# EAGLE board p8x-control-card (EAGLE 9.6.2)

Size 160 x 100 mm. Coordinates in mm from the lower left corner, seen from the top.
Outline: 0,0 160,0 160,100 0,100 0,0
Copper layers (1*2*15*16): Top / Route2 / Route15 / Bottom

## Footprints (pad centres in the part's own frame; a part is rotated, then mirrored left to right if it is on the bottom)
C_DISC = drill 0.9 pad 1.8: 1 0,0; 2 0,-5.08
C_DISC1 = drill 0.9 pad 1.8: 1 0,0; 2 0,-2.54
MABC96R = drill 0.914 pad 1.524: A1 -2.54,39.37; A2 -2.54,36.83; A3 -2.54,34.29; A4 -2.54,31.75; A5 -2.54,29.21; A6 -2.54,26.67; A7 -2.54,24.13; A8 -2.54,21.59; A9 -2.54,19.05; A10 -2.54,16.51; A11 -2.54,13.97; A12 -2.54,11.43; A13 -2.54,8.89; A14 -2.54,6.35; A15 -2.54,3.81; A16 -2.54,1.27; A17 -2.54,-1.27; A18 -2.54,-3.81; A19 -2.54,-6.35; A20 -2.54,-8.89; A21 -2.54,-11.43; A22 -2.54,-13.97; A23 -2.54,-16.51; A24 -2.54,-19.05; A25 -2.54,-21.59; A26 -2.54,-24.13; A27 -2.54,-26.67; A28 -2.54,-29.21; A29 -2.54,-31.75; A30 -2.54,-34.29; A31 -2.54,-36.83; A32 -2.54,-39.37; B1 0,39.37; B2 0,36.83; B3 0,34.29; B4 0,31.75; B5 0,29.21; B6 0,26.67; B7 0,24.13; B8 0,21.59; B9 0,19.05; B10 0,16.51; B11 0,13.97; B12 0,11.43; B13 0,8.89; B14 0,6.35; B15 0,3.81; B16 0,1.27; B17 0,-1.27; B18 0,-3.81; B19 0,-6.35; B20 0,-8.89; B21 0,-11.43; B22 0,-13.97; B23 0,-16.51; B24 0,-19.05; B25 0,-21.59; B26 0,-24.13; B27 0,-26.67; B28 0,-29.21; B29 0,-31.75; B30 0,-34.29; B31 0,-36.83; B32 0,-39.37; C1 2.54,39.37; C2 2.54,36.83; C3 2.54,34.29; C4 2.54,31.75; C5 2.54,29.21; C6 2.54,26.67; C7 2.54,24.13; C8 2.54,21.59; C9 2.54,19.05; C10 2.54,16.51; C11 2.54,13.97; C12 2.54,11.43; C13 2.54,8.89; C14 2.54,6.35; C15 2.54,3.81; C16 2.54,1.27; C17 2.54,-1.27; C18 2.54,-3.81; C19 2.54,-6.35; C20 2.54,-8.89; C21 2.54,-11.43; C22 2.54,-13.97; C23 2.54,-16.51; C24 2.54,-19.05; C25 2.54,-21.59; C26 2.54,-24.13; C27 2.54,-26.67; C28 2.54,-29.21; C29 2.54,-31.75; C30 2.54,-34.29; C31 2.54,-36.83; C32 2.54,-39.37 | hole 2.794: -0.3,45; -0.3,-45
HDR4 = drill 0.9 pad 1.8: 1 0,0; 2 0,-2.54; 3 0,-5.08; 4 0,-7.62
LED5 = drill 0.9 pad 1.8: 1 2.54,0; 2 0,0
R_AXIAL = drill 0.8 pad 1.6: 1 0,0; 2 10.16,0
SW2P = drill 1 pad 1.9: 1 0,0; 2 5.08,0
DIP16 = drill 0.813 pad 1.6: 1 0,0; 2 0,-2.54; 3 0,-5.08; 4 0,-7.62; 5 0,-10.16; 6 0,-12.7; 7 0,-15.24; 8 0,-17.78; 9 7.62,-17.78; 10 7.62,-15.24; 11 7.62,-12.7; 12 7.62,-10.16; 13 7.62,-7.62; 14 7.62,-5.08; 15 7.62,-2.54; 16 7.62,0
DIP14 = drill 0.813 pad 1.6: 1 0,0; 2 0,-2.54; 3 0,-5.08; 4 0,-7.62; 5 0,-10.16; 6 0,-12.7; 7 0,-15.24; 8 7.62,-15.24; 9 7.62,-12.7; 10 7.62,-10.16; 11 7.62,-7.62; 12 7.62,-5.08; 13 7.62,-2.54; 14 7.62,0
DIP20 = drill 0.813 pad 1.6: 1 0,0; 2 0,-2.54; 3 0,-5.08; 4 0,-7.62; 5 0,-10.16; 6 0,-12.7; 7 0,-15.24; 8 0,-17.78; 9 0,-20.32; 10 0,-22.86; 11 7.62,-22.86; 12 7.62,-20.32; 13 7.62,-17.78; 14 7.62,-15.24; 15 7.62,-12.7; 16 7.62,-10.16; 17 7.62,-7.62; 18 7.62,-5.08; 19 7.62,-2.54; 20 7.62,0
DIP28W = drill 0.813 pad 1.6: 1 0,0; 2 0,-2.54; 3 0,-5.08; 4 0,-7.62; 5 0,-10.16; 6 0,-12.7; 7 0,-15.24; 8 0,-17.78; 9 0,-20.32; 10 0,-22.86; 11 0,-25.4; 12 0,-27.94; 13 0,-30.48; 14 0,-33.02; 15 15.24,-33.02; 16 15.24,-30.48; 17 15.24,-27.94; 18 15.24,-25.4; 19 15.24,-22.86; 20 15.24,-20.32; 21 15.24,-17.78; 22 15.24,-15.24; 23 15.24,-12.7; 24 15.24,-10.16; 25 15.24,-7.62; 26 15.24,-5.08; 27 15.24,-2.54; 28 15.24,0
OSC4 = drill 0.8 pad 1.6: 1 0,0; 7 0,-15.24; 8 7.62,-15.24; 14 7.62,0

## Placement (x,y rotation side)
C1  1uF  [C_DISC]  256.03,3.76 0 top  (outside the outline)
C2  100nF  [C_DISC1]  215.19,95.1 0 top  (outside the outline)
C3  100nF  [C_DISC1]  231.41,95.1 0 top  (outside the outline)
C4  100nF  [C_DISC1]  247.63,95.1 0 top  (outside the outline)
C5  100nF  [C_DISC1]  263.85,95.1 0 top  (outside the outline)
C6  100nF  [C_DISC1]  280.07,95.1 0 top  (outside the outline)
C7  100nF  [C_DISC1]  296.29,95.1 0 top  (outside the outline)
C8  100nF  [C_DISC1]  312.51,95.1 0 top  (outside the outline)
C9  100nF  [C_DISC1]  328.73,95.1 0 top  (outside the outline)
C10  100nF  [C_DISC1]  215.19,68.04 0 top  (outside the outline)
C11  100nF  [C_DISC1]  239.03,68.04 0 top  (outside the outline)
C12  100nF  [C_DISC1]  262.87,68.04 0 top  (outside the outline)
C13  100nF  [C_DISC1]  286.71,68.04 0 top  (outside the outline)
C14  100nF  [C_DISC1]  310.55,68.04 0 top  (outside the outline)
C15  100nF  [C_DISC1]  326.77,68.04 0 top  (outside the outline)
C16  100nF  [C_DISC1]  203.37,30.82 0 top  (outside the outline)
C17  100nF  [C_DISC1]  219.59,30.82 0 top  (outside the outline)
C18  100nF  [C_DISC1]  235.81,30.82 0 top  (outside the outline)
C19  100nF  [C_DISC1]  252.03,30.82 0 top  (outside the outline)
C20  100nF  [C_DISC1]  268.25,30.82 0 top  (outside the outline)
C21  100nF  [C_DISC1]  284.47,30.82 0 top  (outside the outline)
C22  100nF  [C_DISC1]  300.69,30.82 0 top  (outside the outline)
J1  MABC96R  [MABC96R]  193.34,49.6 0 top  (outside the outline)
JP1  1x4  [HDR4]  316.91,30.82 0 top  (outside the outline)
LED3  GRN  [LED5]  274.79,3.76 0 top  (outside the outline)
LED4  GRN  [LED5]  296.09,3.76 0 top  (outside the outline)
LED5  RED  [LED5]  317.39,3.76 0 top  (outside the outline)
R1  10K  [R_AXIAL]  212.85,3.86 0 top  (outside the outline)
R2  10K  [R_AXIAL]  227.21,3.86 0 top  (outside the outline)
R3  10K  [R_AXIAL]  241.57,3.86 0 top  (outside the outline)
R4  1K  [R_AXIAL]  281.63,3.86 0 top  (outside the outline)
R5  1K  [R_AXIAL]  302.93,3.86 0 top  (outside the outline)
RP1  1K  [R_AXIAL]  260.33,3.86 0 top  (outside the outline)
SWR  SPST  [SW2P]  321.36,30.77 0 top  (outside the outline)
SWS  SPST  [SW2P]  330.94,30.77 0 top  (outside the outline)
SWT  SPST  [SW2P]  203.42,3.71 0 top  (outside the outline)
U1  74HCT161  [DIP16]  203.27,95.2 0 top  (outside the outline)
U2  74HCT14  [DIP14]  219.49,95.2 0 top  (outside the outline)
U3  74HCT74  [DIP14]  235.71,95.2 0 top  (outside the outline)
U4  74HCT00  [DIP14]  251.93,95.2 0 top  (outside the outline)
U5  74HCT08  [DIP14]  268.15,95.2 0 top  (outside the outline)
U6  74HCT32  [DIP14]  284.37,95.2 0 top  (outside the outline)
U7  74HCT377  [DIP20]  300.59,95.2 0 top  (outside the outline)
U8  74HCT138  [DIP16]  316.81,95.2 0 top  (outside the outline)
U9  74HCT151  [DIP16]  203.27,68.14 0 top  (outside the outline)
U10  28C64  [DIP28W]  219.49,68.14 0 top  (outside the outline)
U11  28C64  [DIP28W]  243.33,68.14 0 top  (outside the outline)
U12  28C64  [DIP28W]  267.17,68.14 0 top  (outside the outline)
U13  28C64  [DIP28W]  291.01,68.14 0 top  (outside the outline)
U14  74HCT374  [DIP20]  314.85,68.14 0 top  (outside the outline)
U15  74HCT374  [DIP20]  331.07,68.14 0 top  (outside the outline)
U16  74HCT374  [DIP20]  207.67,30.92 0 top  (outside the outline)
U17  74HCT374  [DIP20]  223.89,30.92 0 top  (outside the outline)
U18  74HCT161  [DIP16]  240.11,30.92 0 top  (outside the outline)
U19  74HCT86  [DIP14]  256.33,30.92 0 top  (outside the outline)
U20  74HCT244  [DIP20]  272.55,30.92 0 top  (outside the outline)
U21  74HCT74  [DIP14]  288.77,30.92 0 top  (outside the outline)
X1  4MHZ  [OSC4]  304.99,30.92 0 top  (outside the outline)

## Library data of the parts
C1-C22 J1 JP1 LED3-LED5 R1-R5 RP1 SWR SWS SWT U1-U21 X1 = p8x

## Nets
-IRLD: U7.1 U8.9
-RES: J1.A11 U1.1 U2.10 U3.1 U18.1 U21.1 U21.13
-USTL: U4.6 U18.9
ALUM: J1.C23 U16.5
ALUS0: J1.C19 U15.15
ALUS1: J1.C20 U15.16
ALUS2: J1.C21 U15.19
ALUS3: J1.C22 U16.2
BSEL: J1.B28 U17.19
CIN: J1.C24 U16.6
CLK: J1.A24 U2.13 U5.3 U7.11 U18.2
CLKB: J1.A25 U2.12 U14.11 U15.11 U16.11 U17.11
CLKEN: U5.2 U6.3
CLKRAW: JP1.2 U3.3 U3.11 U5.1
CLRC: J1.B27 U17.16
CONDY: U9.5 U10.2 U11.2 U12.2 U13.2
D0: J1.A3 U7.3
D1: J1.A4 U7.4
D2: J1.A5 U7.7
D3: J1.A6 U7.8
D4: J1.A7 U7.13
D5: J1.A8 U7.14
D6: J1.A9 U7.17
D7: J1.A10 U7.18
DIVQA: JP1.3 U1.14
DIVQB: JP1.4 U1.13
DLD0: J1.A16 U8.1 U14.12
DLD1: J1.A17 U8.2 U14.15
DLD2: J1.A18 U8.3 U14.16
DLD3: J1.A19 U8.4 U14.19
DOE0: J1.A12 U14.2
DOE1: J1.A13 U14.5
DOE2: J1.A14 U14.6
DOE3: J1.A15 U14.9
FC: J1.A27 U9.2
FCOND0: U9.11 U16.16
FCOND1: U9.10 U16.19
FCOND2: U9.9 U17.2
FN: J1.A29 U9.15 U19.1
FV: J1.A30 U9.14 U19.2
FZ: J1.A28 U6.13 U9.1
GND: C1.2 C2.2 C3.2 C4.2 C5.2 C6.2 C7.2 C8.2 C9.2 C10.2 C11.2 C12.2 C13.2 C14.2 C15.2 C16.2 C17.2 C18.2 C19.2 C20.2 C21.2 C22.2 J1.A31 J1.A32 J1.B3 J1.B5 J1.B7 J1.B9 J1.B11 J1.B13 J1.B15 J1.B17 J1.B19 J1.B21 J1.B23 J1.B25 J1.B31 J1.B32 J1.C31 J1.C32 LED3.1 SWR.1 SWS.1 SWT.1 U1.3 U1.4 U1.5 U1.6 U1.8 U2.7 U3.7 U4.7 U5.7 U5.9 U5.10 U5.12 U5.13 U6.4 U6.5 U6.7 U6.9 U6.10 U7.10 U8.5 U8.8 U9.4 U9.7 U9.8 U10.14 U10.20 U10.22 U11.14 U11.20 U11.22 U12.14 U12.20 U12.22 U13.14 U13.20 U13.22 U14.1 U14.10 U15.1 U15.10 U16.1 U16.10 U17.1 U17.10 U18.3 U18.4 U18.5 U18.6 U18.8 U19.4 U19.5 U19.7 U19.9 U19.10 U19.12 U19.13 U20.2 U20.4 U20.6 U20.10 U20.11 U20.13 U20.15 U20.17 U21.3 U21.7 U21.11 U21.12 X1.7
HALT: U2.1 U17.6
HALTK: LED5.1 U4.11
HALTN: U2.2 U5.5
IRQ: J1.B29 U21.2
IRQ0: U7.2 U10.10 U11.10 U12.10 U13.10
IRQ1: U7.5 U10.9 U11.9 U12.9 U13.9
IRQ2: U7.6 U10.8 U11.8 U12.8 U13.8
IRQ3: U7.9 U10.7 U11.7 U12.7 U13.7
IRQ4: U7.12 U10.6 U11.6 U12.6 U13.6
IRQ5: U7.15 U10.5 U11.5 U12.5 U13.5
IRQ6: U7.16 U10.4 U11.4 U12.4 U13.4
IRQ7: U7.19 U10.3 U11.3 U12.3 U13.3
LDF: J1.A26 U16.15
LDZN: J1.C28 U17.9
LEDHL: LED5.2 R5.2
LEDP: LED3.2 RP1.2
LEDRN: LED4.2 R4.2
NV: U6.12 U9.13 U19.3
NVZ: U6.11 U9.12
OSCO: JP1.1 U1.2 X1.8
P14B0: U10.11 U14.3
P14B1: U10.12 U14.4
P14B2: U10.13 U14.7
P14B3: U10.15 U14.8
P14B4: U10.16 U14.13
P14B5: U10.17 U14.14
P14B6: U10.18 U14.17
P14B7: U10.19 U14.18
P15B0: U11.11 U15.3
P15B1: U11.12 U15.4
P15B2: U11.13 U15.7
P15B3: U11.15 U15.8
P15B4: U11.16 U15.13
P15B5: U11.17 U15.14
P15B6: U11.18 U15.17
P15B7: U11.19 U15.18
P16B0: U12.11 U16.3
P16B1: U12.12 U16.4
P16B2: U12.13 U16.7
P16B3: U12.15 U16.8
P16B4: U12.16 U16.13
P16B5: U12.17 U16.14
P16B6: U12.18 U16.17
P16B7: U12.19 U16.18
P17B0: U13.11 U17.3
P17B1: U13.12 U17.4
P17B2: U13.13 U17.7
P17B3: U13.15 U17.8
P17B4: U13.16 U17.13
P17B5: U13.17 U17.14
P17B6: U13.18 U17.17
P17B7: U13.19 U17.18
PDEC: J1.A23 U15.12
PINC: J1.A22 U15.9
PSEL0: J1.A20 U15.2
PSEL1: J1.A21 U15.5
PSEL2: J1.C27 U15.6
RSTP: U2.8 U2.11
RSTRAW: C1.1 R1.2 SWT.2 U2.9
RUND: U3.2 U5.6
RUNLK: LED4.1 U4.8 U4.12 U4.13
RUNQ: U3.5 U4.9 U4.10 U6.1
RUNSW: R3.2 SWR.2 U5.4
SETC: J1.C30 U17.15
SH0: J1.C25 U16.9
SH1: J1.C26 U16.12
SHCIN: J1.C29 U17.12
SQ0: U10.25 U11.25 U12.25 U13.25 U18.14
SQ1: U10.24 U11.24 U12.24 U13.24 U18.13
SQ2: U10.21 U11.21 U12.21 U13.21 U18.12
SQ3: U10.23 U11.23 U12.23 U13.23 U18.11
STEPCLR: U3.13 U4.3
STEPN: U2.4 U2.5
STEPP: U2.6 U3.12 U4.2
STEPQ: U3.9 U4.1 U6.2
STEPRAW: R2.2 SWS.2 U2.3
URST: U4.4 U4.5 U17.5
VCC: C2.1 C3.1 C4.1 C5.1 C6.1 C7.1 C8.1 C9.1 C10.1 C11.1 C12.1 C13.1 C14.1 C15.1 C16.1 C17.1 C18.1 C19.1 C20.1 C21.1 C22.1 J1.A1 J1.A2 J1.B1 J1.B2 J1.C1 J1.C2 R1.1 R2.1 R3.1 R4.1 R5.1 RP1.1 U1.7 U1.9 U1.10 U1.16 U2.14 U3.4 U3.10 U3.14 U4.14 U5.14 U6.14 U7.20 U8.6 U8.16 U9.3 U9.16 U10.27 U10.28 U11.27 U11.28 U12.27 U12.28 U13.27 U13.28 U14.20 U15.20 U16.20 U17.20 U18.7 U18.10 U18.16 U19.14 U20.1 U20.8 U20.19 U20.20 U21.4 U21.10 U21.14 X1.14

## Text on the board
tPlace: P8X CONTROL/MICROCODE CARD REV B